# Altium PCB AirCraft_V1.1.PcbDoc
Units mm, origin at the board's own origin, x right, y up, seen from the top; angles counter-clockwise.
Board outline 23.75 x 15.82 mm, 2 copper layers (Top Layer, Bottom Layer); 13 components, 14 nets, 58 pads, 9 vias.
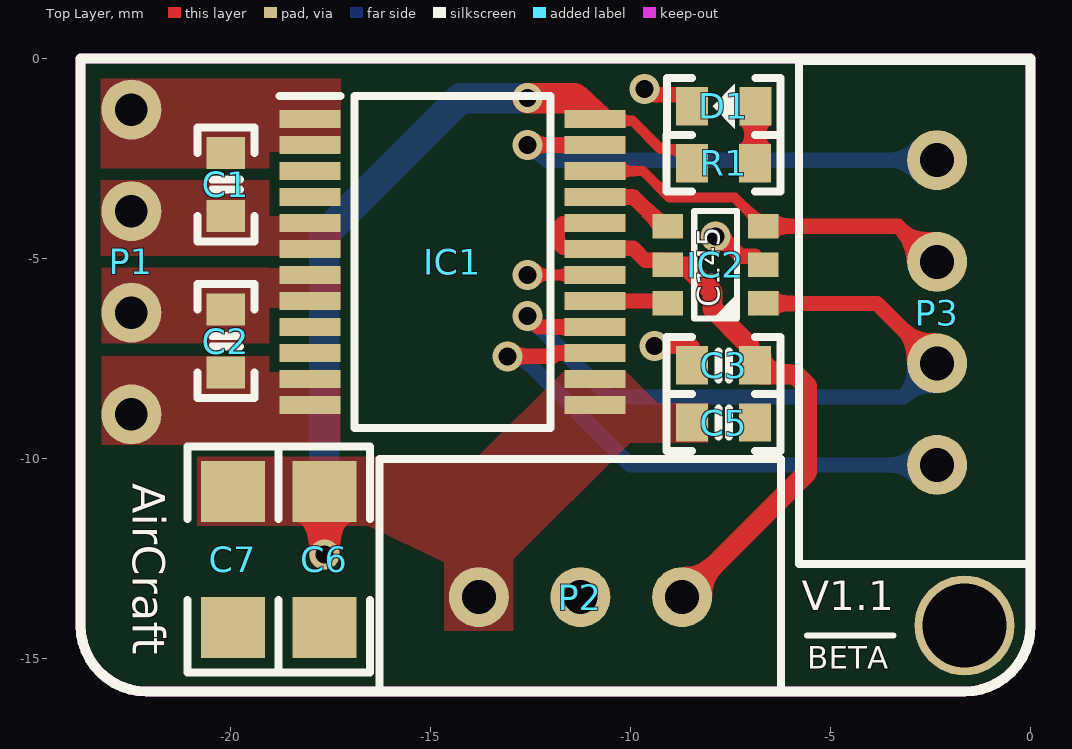
[diagram p0: Top Layer view]
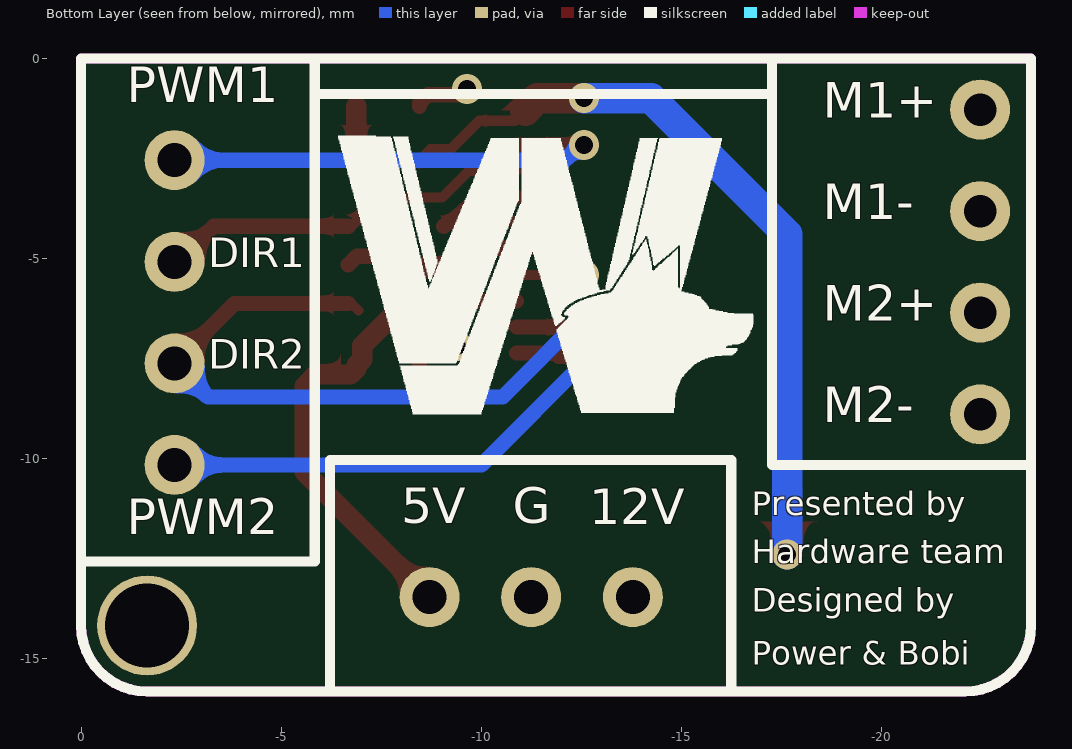
[diagram p1: Bottom Layer view, seen from below]

## Layer stack, top to bottom
Top Solder: solder mask 0.0102, Solder Resist, Dk 3.5
Top Layer: signal copper 0.0356
Dielectric 1: dielectric 0.32, FR-4, Dk 4.8
Bottom Layer: signal copper 0.0356
Bottom Solder: solder mask 0.0102, Solder Resist, Dk 3.5

## Board outline
-23.749,-14.173 ccw(c-22.098,-14.173) -22.098,-15.824 -1.651,-15.824 ccw(c-1.651,-14.173) 0,-14.173 0,0 -23.749,0

## Design rules (kind name [scope] priority, off if disabled: settings)
Clearance [All] p1: gap=0.254 ignorepadtopadclearanceinfootprint=FALSE except(0: Arc-Hole Track-Hole SMDPad-Hole THPad-Hole Via-Hole Fill-Hole Poly-Hole Region-Hole Text-Hole)
PlaneConnect [All] p1: planeconnectstyle=Direct reliefexpansion=0.508 reliefentries=4 reliefconductorwidth=0.254 reliefairgap=0.254
PolygonConnect [All] p1: connectstyle=Direct reliefconductorwidth=0.254 reliefentries=4 polygonreliefangle="90 Angle" airgapwidth=0.254
RoomDefinition AirCraft_V1.0 [InComponentClass('AirCraft_V1.0')] p1: confinementstyle=ConfineIn formatcopy=TRUE lockcomponents=FALSE outline -165.862,-81.966 -115.062,-81.966 -115.062,-56.566 -165.862,-56.566
RoutingVias [All] p1: holewidth=0.45 width=0.75 viastyle="Through Hole" minholewidth=0.45 minwidth=0.75 maxholewidth=0.45 maxwidth=0.75
SolderMaskExpansion [All] p1: expansion=0.102 istentingtop=FALSE
Width [All] p1: maxlimit=1.27 minlimit=0.254 preferedwidth=0.381
29 further rules are at their usual default settings.

## Components (designator, comment, footprint, x,y, rotation, side; value= is the part's Value field where it differs from the comment)
C1 "100nF" CAP-0603 -20.117,-3.147 r90 top
C2 "100nF" CAP-0603 -20.117,-7.064 r90 top
C3 "100nF" CAP-0603 -7.673,-7.671 r0 top
C5 "100nF" CAP-0603 -7.673,-9.099 r180 top
C6 "47uF" CAP-1206 -17.653,-12.52 r90 top
C7 "47uF" CAP-1206 -19.939,-12.52 r90 top
D1 "RED" LED-0603 -7.671,-1.194 r180 top
IC1 "TB6612FNG" SSOP24 -14.45,-5.084 r0 top locked
IC2 "SN74LVC2G14DBV" SOT-23-6 -7.874,-5.156 r0 top locked
P1 "HDR1x4_2.54" HDR1X4_2.54_90 -22.478,-8.894 r180 top locked
P2 "XH-3AW" XH_3 -11.252,-13.462 r0 top locked
P3 "XH-4AW" XH_4 -2.337,-6.35 r90 top locked
R1 "4.7k" R-0603 -7.673,-2.616 r180 top

## Footprints (in the part's own frame and the unit in brackets; to place one, negate y for a bottom-side part, rotate by r counter-clockwise, add the part's x,y. Pads: shape width x height; smd on the part's side, far side on the other; paste and mask are expansions set on the pad)
CAP-0603 [mm]
  rect 0.8x0.96 smd: 1(-0.79,0) 2(0.79,0)
  silkscreen extent -1.42,-0.71 1.42,0.71, body extent -0.76,-0.39 0.76,0.39, height 0.9
CAP-1206 [mm] "贴片元件"
  rect 1.524x1.6 smd: 1(-1.703,0) 2(1.7,0)
  silkscreen extent -2.83,-1.14 2.83,1.14, body extent -1.91,-0.89 1.91,0.89, height 1
HDR1X4_2.54_90 [mm]
  round 1.5 hole 0.813: 1(0,0) 2(0,-2.54) 3(0,-5.08) 4(0,-7.62)
  body extent -0.38,-8.79 10.76,1.17, height 2.52
LED-0603 [mm]
  rect 0.8x0.96 smd: 1(-0.79,0) 2(0.79,0)
  silkscreen extent -1.42,-0.71 1.42,0.71, body extent -0.81,-0.4 0.81,0.4, height 0.6
R-0603 [mm]
  rect 0.8x0.96 smd: 1(-0.79,0) 2(0.79,0)
  silkscreen extent -1.42,-0.71 1.42,0.71, body extent -0.76,-0.38 0.76,0.38, height 0.41
SOT-23-6 [mil]
  rect 30x24 smd: 1(47,-38) 2(47,0) 3(47,38) 4(-47,38) 5(-47,0) 6(-47,-38)
  silkscreen extent -21,-53 21,53, body extent -55,-57 55,57, height 57
SSOP24 [mm]
  rect 1.525x0.45 smd: 1(-3.562,3.575) 2(-3.562,2.925) 3(-3.562,2.275) 4(-3.562,1.625) 5(-3.562,0.975) 6(-3.562,0.325) 7(-3.562,-0.325) 8(-3.562,-0.975) 9(-3.562,-1.625) 10(-3.562,-2.275) 11(-3.562,-2.925) 12(-3.562,-3.575) 13(3.562,-3.575) 14(3.562,-2.925) 15(3.562,-2.275) 16(3.562,-1.625) 17(3.562,-0.975) 18(3.562,-0.325) 19(3.562,0.325) 20(3.562,0.975) 21(3.562,1.625) 22(3.562,2.275) 23(3.562,2.925) 24(3.562,3.575)
  silkscreen extent -4.33,-4.15 2.45,4.15, body extent -3.8,-4.15 3.8,4.15, height 1.6
XH_3 [mm]
  round 1.5 hole 0.85: 1(-2.54,0) 2(0,0) 3(2.54,0)
  silkscreen extent -5.02,-2.35 5.02,3.45, body extent -5.02,-2.35 5.02,3.45, height 7.21
XH_4 [mm]
  round 1.5 hole 0.85: 1(-3.81,0) 2(-1.27,0) 3(1.27,0) 4(3.81,0)
  silkscreen extent -6.29,-2.35 6.29,3.45, body extent -6.29,-2.35 6.29,3.45, height 7.2

## Part data
C1 C2 C3 C5 C6 C7: library part CAP, "贴片电容", Package=0402, SuppliersPartNumber=C52923, ComponentLink1Description=供应商链接, ComponentLink1URL=http://www.szlcsc.com/product/details_53938.html, Supplier=LC
D1: library part LED, "发光二极管", Package=0603, SuppliersPartNumber=C2290, ComponentLink1Description=供应商链接, ComponentLink1URL=http://www.szlcsc.com/product/details_2663.html, Supplier=LC
IC1: "集成电机驱动芯片", Manufacturer_Name=Toshiba, Manufacturer_Part_Number=TB6612FNG(O,EL), Mouser Part Number=757-TB6612FNG(O,EL), Datasheet Link=https://th.mouser.com/datasheet/2/408/TB6612FNG_datasheet_en_20141001-708260.pdf, Height=1.6mm, Mouser Price/Stock=https://www.mouser.co.uk/ProductDetail/Toshiba/TB6612FNGOEL?qs=%2FbfygUuxYr5ys7QLPOzyng%3D%3D
IC2: "变换器", Arrow Part Number=SN74LVC2G14DBVR, Manufacturer_Name="Texas Instruments", Mouser Part Number=595-SN74LVC2G14DBVR, Arrow Price/Stock=https://www.arrow.com/en/products/sn74lvc2g14dbvr/texas-instruments, Datasheet Link=http://componentsearchengine.com/Datasheets/3/SN74LVC2G14DBVR.pdf, Height=1.45mm, Manufacturer_Part_Number=SN74LVC2G14DBVR, Mouser Price/Stock=https://www.mouser.co.uk/ProductDetail/Texas-Instruments/SN74LVC2G14DBVR?qs=q2XTDbzbm6DXbZiJ8Yzjpw%3D%3D
P1: "Header"
P2: library part HDR1x3_2.54, "Header"
P3: library part HDR1x4_2.54, "Header"
R1: library part RES, "贴片电阻", Package=0805, SuppliersPartNumber=C17798, Supplier=LC

## Free pads (board coordinates)
  round 2.5 hole 2.1: 1(-1.651,-14.173)

## Via types
v1: diameter 0.75, hole 0.45, Top Layer to Bottom Layer, 9 vias

## Nets (pads, with @x,y where several pads share a name; then routed paths per layer and width w, separated by ;. In a path a pad name is that pad's centre, name@x,y a point inside that pad or via, vN(x,y) a via of type N, cw(c..) or ccw(c..) an arc to the next point about the centre after c; other vN are vias at no path point)
5V: C3.2 IC1.19 IC1.20 IC2.5 P2.3 | length 15.1
  Top Layer w0.381: -11.692,-4.127 -11.828,-4.263 -11.828,-4.578 -11.682,-4.725 -10.923,-4.725 IC1.19 ; IC1.20@-10.923,-4.144 IC1.20 ; IC1.19@-10.665,-4.74 -9.942,-4.74 -9.64,-5.042 -9.182,-5.042 IC2.5
  Top Layer w0.508: IC2.5 -9.017,-5.207 -8.578,-5.207 -7.95,-5.835 -7.95,-6.256 -7.029,-7.176 -7.029,-7.525 C3.2 -6.883,-7.751 -6.737,-7.897 -5.886,-7.897 -5.588,-8.194 -5.588,-10.338 P2.3
12V: C5.2 C6.2 C7.2 IC1.13 IC1.14 IC1.24 P2.1 R1.2 | length 20.5
  Top Layer w0.254: IC1.24@-10.844,-1.553 -9.953,-1.553 -9.243,-2.263 -8.736,-2.263 -8.463,-2.536 R1.2
  Top Layer w0.762: v1(-17.653,-12.395) C6.2 ; v1(-12.573,-0.991) -11.407,-0.991 IC1.24@-11.098,-1.299
  Bottom Layer w0.762: v1(-17.653,-12.395) -17.653,-4.394 -14.249,-0.991 v1(-12.573,-0.991)
DIR1: IC1.22 IC2.3 P3.3 | length 9.5
  Top Layer w0.254: IC1.22 -9.689,-2.809 -9.021,-3.477 -7.394,-3.477 -6.934,-3.937 -6.934,-4.013 -6.756,-4.191 IC2.3
  Top Layer w0.381: IC2.3 -3.317,-4.191 -2.428,-5.08 P3.3
DIR2: IC1.16 IC2.1 P3.2 | length 18.5
  Top Layer w0.254: IC2.1@-6.934,-6.299 -6.756,-6.121 IC2.1
  Top Layer w0.381: v1(-12.573,-6.438) -12.302,-6.709 IC1.16 ; IC2.1 -3.836,-6.121 P3.2
  Bottom Layer w0.381: v1(-12.573,-6.438) -12.561,-6.438 -10.541,-8.458 -3.176,-8.458 P3.2
GND: C3.1 C5.1 C6.1 C7.1 D1.2 IC1.3 IC1.4 IC1.9 IC1.10 IC1.18 IC2.2 P2.2 | length 6
  Top Layer w0.254: v1(-12.573,-5.409) IC1.18
  Top Layer w0.381: v1(-9.652,-0.756) -9.552,-0.756 -9.404,-0.904 -8.67,-0.904 -8.461,-1.114 D1.2 ; v1(-9.398,-7.188) -8.463,-7.188 C3.1 ; v1(-7.874,-4.445) -7.741,-4.445 -7.245,-4.94 -6.896,-4.94 IC2.2
NetC1_1: C1.1 IC1.5 IC1.6 P1.3
NetC1_2: C1.2 IC1.1 IC1.2 P1.4
NetC2_1: C2.1 IC1.11 IC1.12 P1.1
NetC2_2: C2.2 IC1.7 IC1.8 P1.2
NetD1_A: D1.1 R1.1 | length 1.4
  Top Layer w0.508: R1.1 -6.882,-2.615 -6.882,-1.195 D1.1
NetIC1_17: IC1.17 IC2.6 | length 1.8
  Top Layer w0.381: IC1.17 -9.13,-6.059 IC2.6
NetIC1_21: IC1.21 IC2.4 | length 2.1
  Top Layer w0.381: IC1.21 -9.922,-3.459 -9.305,-4.077 -9.182,-4.077 IC2.4
PWM1: IC1.23 P3.4 | length 12.1
  Top Layer w0.381: v1(-12.573,-2.159) IC1.23
  Bottom Layer w0.381: v1(-12.573,-2.159) -12.473,-2.159 -12.092,-2.54 P3.4
PWM2: IC1.15 P3.1 | length 14.1
  Top Layer w0.381: v1(-13.081,-7.442) -11.938,-7.442 -11.855,-7.359 IC1.15
  Bottom Layer w0.381: v1(-13.081,-7.442) -12.728,-7.442 -10.01,-10.16 P3.1

## Polygon pours and split planes (outlines as drawn)
GND on Top Layer "NONET_L01_P013" (solid, remove dead copper, shelved, pour order 13): -29.388,3.962 -29.388,3.988 1.829,3.988 1.829,-19.304 -28.651,-19.304
12V on Top Layer "12V_L01_P007" (solid, pour order 7): -20.828,-9.957 -20.828,-11.684 -16.567,-11.684 -14.656,-12.596 -14.656,-14.3 -12.929,-14.3 -12.929,-12.522 -10.008,-9.601 -8.052,-9.601 -8.052,-8.611 -9.322,-8.611 -10.135,-7.798 -11.659,-7.798 -13.818,-9.957
no net on Top Layer "NONET_L01_P004" (solid, pour order 4): -14.351,-14.046
NetC1_1 on Top Layer "NETC1_1_L01_P001" (solid, remove dead copper, pour order 1): -23.241,-3.048 -17.242,-3.048 -17.242,-4.928 -23.241,-4.928
NetC2_1 on Top Layer "NETC2_1_L01_P003" (solid, remove dead copper, pour order 3): -23.216,-7.442 -17.255,-7.442 -17.255,-9.652 -23.216,-9.652
NetC2_2 on Top Layer "NETC2_2_L01_P002" (solid, remove dead copper, pour order 2): -23.218,-5.232 -17.249,-5.232 -17.249,-7.112 -23.218,-7.112
NetC1_2 on Top Layer "NETC1_2_L01_P000" (solid, remove dead copper, pour order 0): -23.241,-0.508 -17.247,-0.508 -17.247,-2.743 -23.241,-2.743
GND on Bottom Layer "NONET_L02_P014" (solid, remove dead copper, shelved, pour order 14): -26.34,2.591 3.632,2.591 3.632,-19.609 -26.594,-19.609

## Keep-outs
Keep-Out Layer:
  the board outline again, w0.254

## Silkscreen, mask and mechanical layers (free items; w line width, h text height)
Top Overlay:
  lines w0.152: -5.588,-14.427 -3.429,-14.427
  lines w0.254: -23.749,-14.173 ccw(c-22.098,-14.173) -22.098,-15.824 -1.651,-15.824 ccw(c-1.651,-14.173) 0,-14.173 0,0 -23.749,0 -23.749,-14.173
  text "C145" at -7.579,-6.223 h0.97 r90
  text "AirCraft" at -22.718,-10.617 h1.4 r270
  text "V1.1" at -5.714,-14.046 h1.27
  text "BETA" at -5.588,-15.443 h0.97
Bottom Overlay:
  drawing of 1751 lines, arcs and shapes, not listed
  text "PWM1" at -1.143,-1.397 h1.52
  text "M1+" at -18.542,-1.778 h1.52
  text "M1-" at -18.542,-4.318 h1.52
  text "DIR1" at -3.175,-5.461 h1.27
  text "M2+" at -18.542,-6.858 h1.52
  text "DIR2" at -3.175,-8.001 h1.27
  text "M2-" at -18.542,-9.398 h1.52
  text "Presented by" at -16.764,-11.62 h1.02
  text "G" at -10.795,-11.922 h1.52
  text "5V" at -8.001,-11.922 h1.52
  text "12V" at -12.7,-11.938 h1.52
  text "PWM2" at -1.143,-12.192 h1.52
  text "Hardware team" at -16.764,-12.816 h1.02
  text "Designed by" at -16.764,-14.033 h1.02
  text "Power & Bobi" at -16.764,-15.352 h1.02
Mechanical 1:
  the board outline again, w0.254